# Altium PCB BackBoomPcb.PcbDoc
Units mil, origin at the board's own origin, x right, y up, seen from the top; angles counter-clockwise.
Board outline 6000 x 4000 mil, 2 copper layers (Top Layer, Bottom Layer); 24 components, 17 nets, 51 pads, 0 vias.
Unrouted connection lines stored in the file: 32.
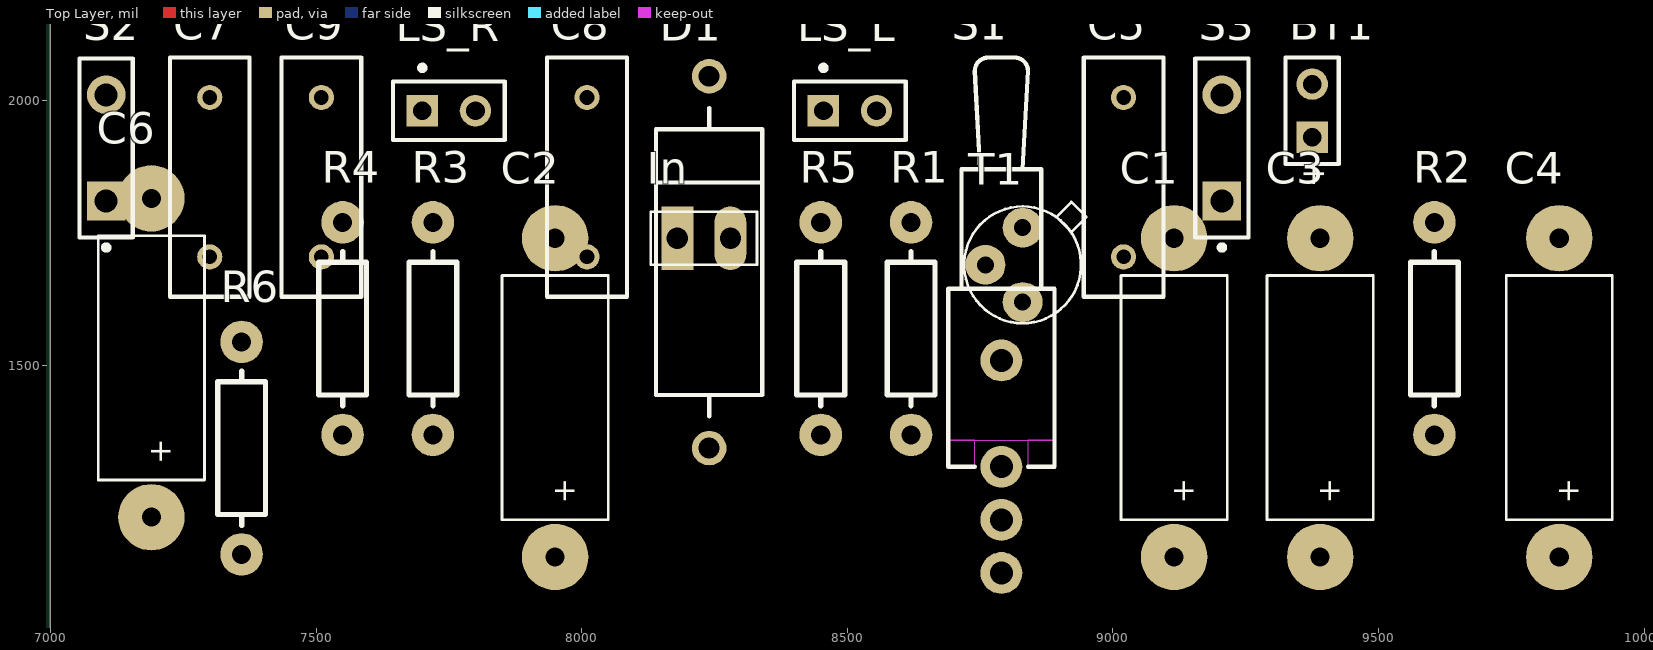
[diagram p0: Top Layer view]
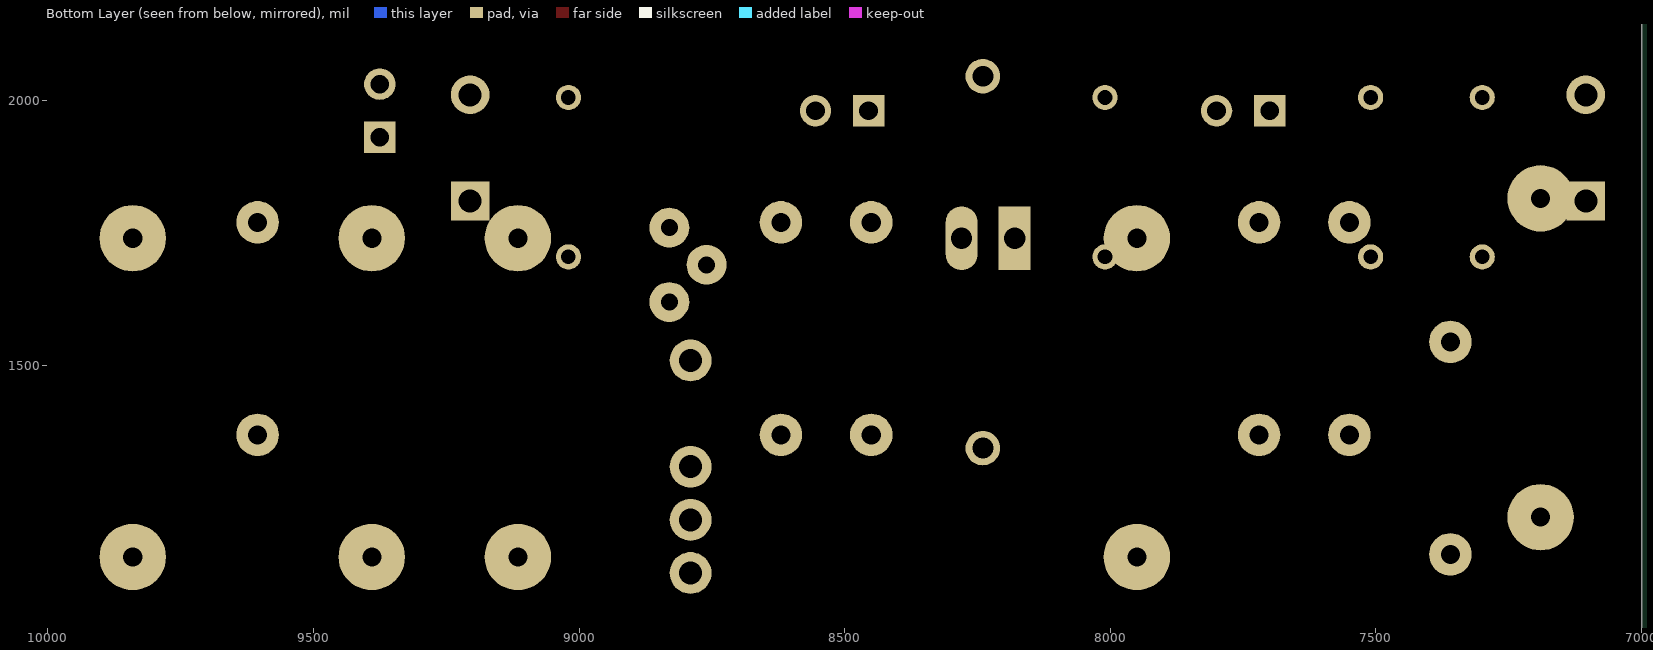
[diagram p1: Bottom Layer view, seen from below]

## Layer stack, top to bottom
Top Solder: solder mask 0.4, Solder Resist, Dk 3.5
Top Layer: signal copper 1.4
Dielectric 1: dielectric 12.6, FR-4, Dk 4.8
Bottom Layer: signal copper 1.4
Bottom Solder: solder mask 0.4, Solder Resist, Dk 3.5

## Board outline
1000,1000 7000,1000 7000,5000 1000,5000

## Design rules (kind name [scope] priority, off if disabled: settings)
Clearance [All] p1: gap=10
PolygonConnect [All] p1: connectstyle=Relief reliefconductorwidth=10 reliefentries=4 polygonreliefangle="90 Angle" airgapwidth=10
RoomDefinition BackBoomSchem [InComponentClass('BackBoomSchem')] p1: confinementstyle=ConfineIn formatcopy=TRUE lockcomponents=FALSE outline 7045,1060 10240,1060 10240,2435 7045,2435
RoutingVias [All] p1: holewidth=28 width=50 viastyle="Through Hole" minholewidth=28 minwidth=50 maxholewidth=28 maxwidth=50
SolderMaskExpansion [All] p1: expansion=4
UnpouredPolygon [All] p1: allowunpoured=FALSE
Width [All] p1: maxlimit=10 minlimit=10 preferedwidth=10
29 further rules are at their usual default settings.

## Components (designator, comment, footprint, x,y, rotation, side; value= is the part's Value field where it differs from the comment)
BT1 "Battery" BAT-2 9375,1980 r90 top
C1 "Cap" "cap 48 pol (.46/.2/.6/125/36)" 9115,1440 r90 top
C2 "Cap" "cap 48 pol (.46/.2/.6/125/36)" 7950,1440 r90 top
C3 "Cap" "cap 48 pol (.46/.2/.6/125/36)" 9390,1440 r90 top
C4 "Cap" "cap 48 pol (.46/.2/.6/125/36)" 9840,1440 r90 top
C5 "100nF" RAD-0.3 9020,1855 r90 top
C6 "Cap" "cap 48 pol (.46/.2/.6/125/36)" 7190,1515 r90 top
C7 "Cap" RAD-0.3 7300,1855 r90 top
C8 "Cap" RAD-0.3 8010,1855 r90 top
C9 "Cap" RAD-0.3 7510,1855 r90 top
D1 "D Zener" DIODE-0.7 8240,1695 r90 top
In "Input" "hdr 1x2" 8180,1740 r0 top
LS_L "Speaker" PIN2 8455,1980 r0 top
LS_R "Speaker" PIN2 7700,1980 r0 top
R1 "Res" "ws 0.6W H" 8620,1570 r90 top
R2 "Res" "ws 0.6W H" 9605,1570 r90 top
R3 "Res" "ws 0.6W H" 7720,1570 r90 top
R4 "Res" "ws 0.6W H" 7550,1570 r90 top
R5 "Res" "ws 0.6W H" 8450,1570 r90 top
R6 "Res" "ws 0.6W H" 7360,1345 r90 top
S1 "SW-SPDT" TL36WW15050 8790,1310 r90 top
S2 "SW-PB" SPST-2 7105,1910 r90 top
S3 "SW-SPST" SPST-2 9205,1910 r90 top
T1 "BC107" TO-18 8830,1690 r0 top

## Footprints (in the part's own frame and the unit in brackets; to place one, negate y for a bottom-side part, rotate by r counter-clockwise, add the part's x,y. Pads: shape width x height; smd on the part's side, far side on the other; paste and mask are expansions set on the pad)
BAT-2 [mm] "Battery; 2 Leads"
  rect 1.5x1.5 hole 0.9: 1(-1.27,0)
  round 1.5 hole 0.9: 2(1.27,0)
  silkscreen extent -2.54,-1.27 2.54,1.27
"cap 48 pol (.46/.2/.6/125/36)" [mil]
  round 125 / inner round 60 / far side round 125 hole 36 paste+0 mask+0: 1(-300,0) 2(300,0)
  silkscreen extent -230,-100 230,100
DIODE-0.7 [mm] "Diode, Thru-Hole; 2 Leads; 0.7 in Pin Spacing"
  round 1.65 hole 1: 1(-8.89,0) 2(8.89,0)
  silkscreen extent -7.37,-2.54 7.37,2.54
"hdr 1x2" [mil]
  rect 60x120 / inner round 60 / far side rect 60x120 hole 40 paste+0 mask+0: 1(0,0)
  oval 60x120 / inner round 60 / far side oval 60x120 hole 40 paste+0 mask+0: 2(100,0)
  silkscreen extent -50,-50 150,50
PIN2 [mm] "Photosensitive Diode; 2 Leads"
  rect 1.5x1.5 hole 0.9: 1(0,0)
  round 1.5 hole 0.9: 2(2.54,0)
  silkscreen extent -1.4,-1.4 3.94,2.17
RAD-0.3 [mm] "Radial Cap, Thru-Hole; 2 Leads; 0.3 in Pin Spacing"
  round 1.2 hole 0.7: 1(-3.81,0) 2(3.81,0)
  silkscreen extent -5.71,-1.91 5.71,1.91
SPST-2 [mm] "Switch; 2 Leads"
  rect 1.85x1.85 hole 1.1: 1(-2.54,0)
  round 1.85 hole 1.1: 2(2.54,0)
  silkscreen extent -4.89,-1.27 4.28,1.27
TL36WW15050 [mm] "Switch; 4 Leads"
  round 2 hole 1.1: 1(0,0) 2(-2.54,0) 3(-5.08,0) M(5.08,0)
  Top Layer keep-out region: 1.27,2.54 1.27,-2.54 8.509,-2.54 8.509,2.54
  Top Layer keep-out region: 0,2.54 0,1.27 1.27,1.27 1.27,2.54
  Top Layer keep-out region: 0,-1.27 0,-2.54 1.27,-2.54 1.27,-1.27
  silkscreen extent 0,-2.54 19.56,2.54
TO-18 [mil]
  round 75 / inner round 60 / far side round 75 hole 32 paste+0 mask+0: 1(0,70) 2(-70,0) 3(0,-70)
  silkscreen extent -110,-110 120,118
"ws 0.6W H" [mil]
  round 80 hole 36: 1(-200,0) 2(200,0)
  silkscreen extent -145,-45 145,45

## Part data
BT1: "Multicell Battery"
C1 C2 C3 C4 C6: library part CECA0.47uF/63V, "elektrolytische condensator axiaal 0.47uF/63V"
C5: library part Cap, "Capacitor"
C7 C8 C9: "Capacitor"
D1: "Zener Diode"
In: library part "CON HDR 1x2", "pcb header recht 1x2  pitch 100mil"
LS_L LS_R: "Loudspeaker"
R1 R2 R3 R4 R5 R6: library part 0R2, "weerstand 0R2 0.6W"
S1: "SPDT Subminiature Toggle Switch, Right Angle Mounting, Vertical Actuation"
S2: "Switch"
S3: "Single-Pole, Single-Throw Switch"
T1: "NPN transistor"

## Nets (pads, with @x,y where several pads share a name; then routed paths per layer and width w, separated by ;. In a path a pad name is that pad's centre, name@x,y a point inside that pad or via, vN(x,y) a via of type N, cw(c..) or ccw(c..) an arc to the next point about the centre after c; other vN are vias at no path point)
GND: BT1.2 C4.2 C5.1 C6.2 C7.1 C8.1 C9.1 D1.1 LS_L.1 LS_R.1 R3.1 S1.3 S2.1
NetBT1_1: BT1.1 S3.2
NetC1_1: C1.1
NetC1_2: C1.2 In.1
NetC2_1: C2.1
NetC2_2: C2.2 In.2
NetC3_1: C3.1 C4.1 C5.2 R2.2 S1.1 S3.1
NetC3_2: C3.2 R2.1 T1.3
NetC6_1: C6.1 C7.2
NetC8_2: C8.2 R5.2
NetC9_2: C9.2 R6.1
NetD1_2: D1.2 R1.1 T1.2
NetLS_L_2: LS_L.2 R5.1
NetLS_R_2: LS_R.2 R6.2
NetR1_2: R1.2 S1.2
NetR3_2: R3.2 R4.2 T1.1
NetR4_1: R4.1 S2.2
pads on no net: S1.M

## Text inside footprints (layer, text, board x,y; h text height)
BT1: Top Overlay "+" at 9397.72,1835.51 h45.28 r90
C1: Top Overlay "+" at 9152,1240 h42 r90
C2: Top Overlay "+" at 7987,1240 h42 r90
C3: Top Overlay "+" at 9427,1240 h42 r90
C4: Top Overlay "+" at 9877,1240 h42 r90
C6: Top Overlay "+" at 7227,1315 h42 r90